# EAGLE board BOTTOM_BRDv1.0.1 (EAGLE 9.6.2)
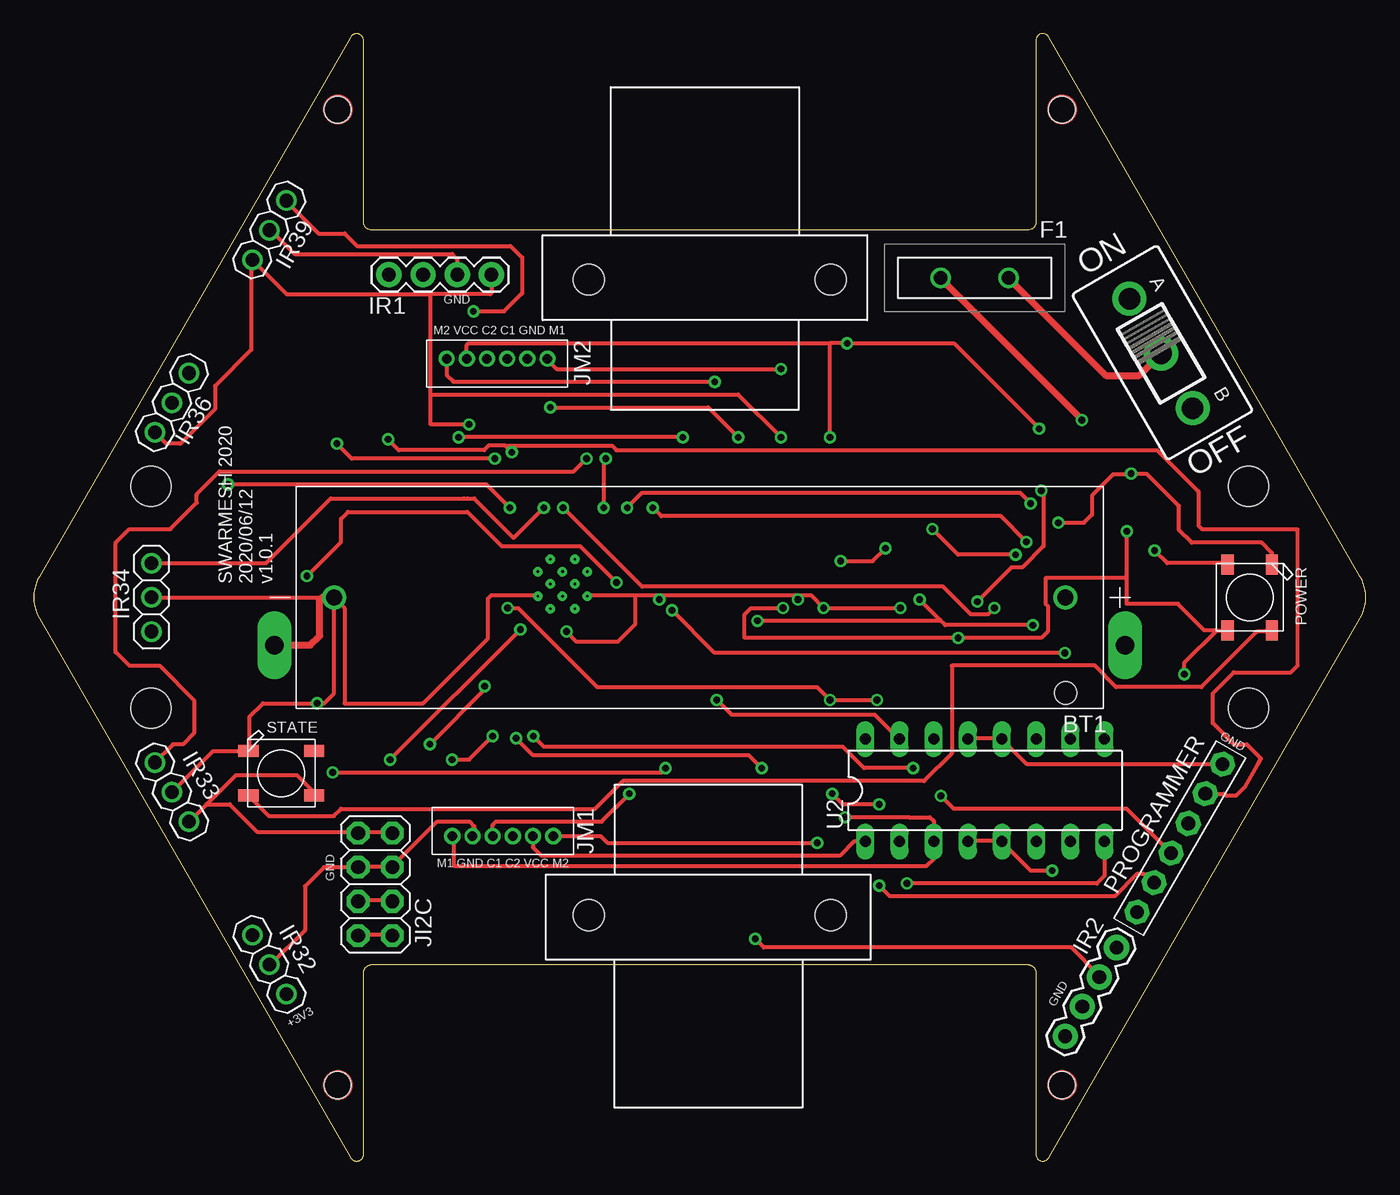
[diagram p0: board, top side]
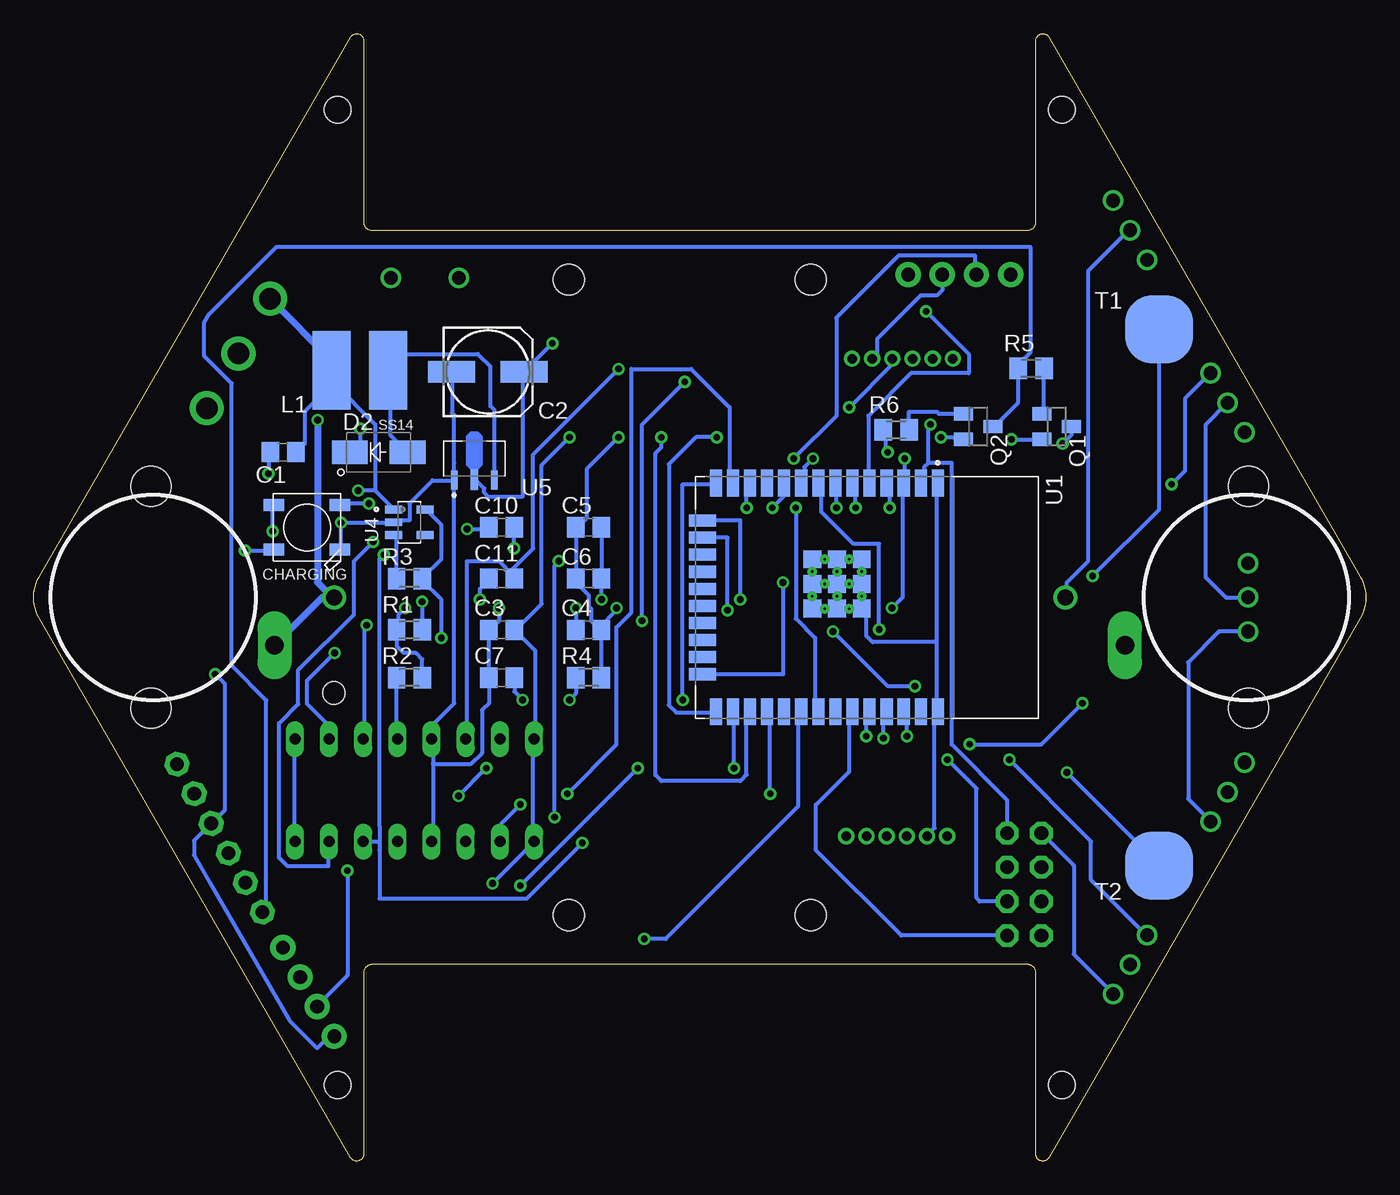
[diagram p1: board, bottom side, seen from below]

Size 99.06 x 83.84 mm. Coordinates in mm from the lower left corner, seen from the top.
Outline: 75.47,0.25 98.65,40.4 arc60 98.65,43.44 75.47,83.59 arc150 74.53,83.34 74.53,69.86 arc-90 73.89,69.22 25.17,69.22 arc-90 24.53,69.86 24.53,83.34 arc150 23.59,83.59 0.41,43.44 arc60 0.41,40.4 23.59,0.25 arc150 24.53,0.5 24.53,13.98 arc-90 25.17,14.62 73.89,14.62 arc-90 74.53,13.98 74.53,0.5 arc150 75.47,0.25
Copper layers (1*16): Top 0.035mm / dielectric 0.15mm / Bottom 0.035mm
Design rules "default *": minimum track width 12mil, minimum drill 0.5mm, track to track 12mil, track to pad 12mil, pad to pad 12mil, via to via 12mil, smd to smd 12mil, copper to edge 40mil, drill to drill 25mil, minimum pad ring 10mil, minimum via ring 8mil, stop-mask expansion 4mil, vias tented up to drill 0mil, thermal gap 10mil
Holes 2 mm at 76.46,78.19 22.61,78.19 22.61,5.65 76.46,5.65
Holes 3 mm at 8.73,50.17 8.73,33.67 90.33,50.17 90.33,33.67
Holes 2.3 mm at 41.28,65.54 59.28,65.54 59.28,18.3 41.28,18.3
tKeepout: area 74.8,76.6 to 78.1,79.8; area 21,76.6 to 24.2,79.8; area 21,4 to 24.2,7.3; area 74.8,4 to 78.1,7.3

## Footprints (pad centres in the part's own frame; a part is rotated, then mirrored left to right if it is on the bottom)
BAT_6S-AA = drill 1.19: + -27.2,0; - 27.2,0 | hole 1.67: -27.2,7.1
C0805 = smd 1.3 x 1.5: 1 -0.95,0; 2 0.95,0
153CLV-0605 = smd 3.5 x 1.6: + 2.7,0; - -2.7,0
WS2812B = smd 1.5 x 0.9: 1-VDD 2.45,-1.65; 2-DOUT 2.45,1.65; 3-GND -2.45,1.65; 4-DIN -2.45,-1.65
1X1-BIGPOGO = drill 1.4 pad 2.54 long: P$1 0,0
DO214 = smd 2.65 x 1.75: ANODE -2.15,0; CATHODE 2.15,0
RUEF300K2 = drill 1.01 pad 1.515: 1 0,0; 2 5.05,0
1X04 = drill 1.016 pad 1.88: 1 0,0; 2 2.54,0; 3 5.08,0; 4 7.62,0
1X03 = drill 1.016: 1 -2.54,0; 2 0,0; 3 2.54,0
2X04 = drill 1.016 pad 1.676 octagon: 1 -3.81,-1.27; 2 -3.81,1.27; 3 -1.27,-1.27; 4 -1.27,1.27; 5 1.27,-1.27; 6 1.27,1.27; 7 3.81,-1.27; 8 3.81,1.27
B6B-ZR = drill 0.7: 1 9,-1.3; 2 7.5,-1.3; 3 6,-1.3; 4 4.5,-1.3; 5 3,-1.3; 6 1.5,-1.3
INDP5858X480N = smd 2.8 x 5.85: 1 -2.1,0; 2 2.1,0
1X06-BIG = drill 1.016 pad 1.778 octagon: 1 -6.35,0; 2 -3.81,0; 3 -1.27,0; 4 1.27,0; 5 3.81,0; 6 6.35,0
SOT23 = smd 1 x 1.4: 1 -0.95,-1.1; 2 0.95,-1.1; 3 0,1.1
M0805 = smd 1.3 x 1.6: 1 -0.95,0; 2 0.95,0
CS12ANW03 = drill 1.6 pad 2.54: A -4.674,0; B 4.724,0; C 0.025,0
SPRING-CONNECTOR = smd 5.08 x 5.08: P$2 0,0
MODULE_ESP32-WROOM-32D = smd 2 x 0.9: 1 -8.5,5.26; 2 -8.5,3.99; 3 -8.5,2.72; 4 -8.5,1.45; 5 -8.5,0.18; 6 -8.5,-1.09; 7 -8.5,-2.36; 8 -8.5,-3.63; 9 -8.5,-4.9; 10 -8.5,-6.17; 11 -8.5,-7.44; 12 -8.5,-8.71; 13 -8.5,-9.98; 14 -8.5,-11.25; 25 8.5,-11.25; 26 8.5,-9.98; 27 8.5,-8.71; 28 8.5,-7.44; 29 8.5,-6.17; 30 8.5,-4.9; 31 8.5,-3.63; 32 8.5,-2.36; 33 8.5,-1.09; 34 8.5,0.18; 35 8.5,1.45; 36 8.5,2.72; 37 8.5,3.99; 38 8.5,5.26 | smd 0.9 x 2: 15 -5.715,-12.25; 16 -4.445,-12.25; 17 -3.175,-12.25; 18 -1.905,-12.25; 19 -0.635,-12.25; 20 0.635,-12.25; 21 1.905,-12.25; 22 3.175,-12.25; 23 4.445,-12.25; 24 5.715,-12.25 | smd 1.33 x 1.33: 39_1 -2.835,-0.405; 39_2 -1,-0.405; 39_3 0.835,-0.405; 39_4 -2.835,-2.24; 39_5 -1,-2.24; 39_6 0.835,-2.24; 39_7 -2.835,-4.075; 39_8 -1,-4.075; 39_9 0.835,-4.075 | drill 0.2 pad 0.3: 39_10 -1.917,-0.405; 39_11 -0.083,-0.405; 39_12 -2.835,-1.323; 39_13 -1,-1.323; 39_14 0.835,-1.323; 39_15 -1.917,-2.24; 39_16 -0.083,-2.24; 39_17 -2.835,-3.158; 39_18 -1,-3.158; 39_19 0.835,-3.158; 39_20 -1.917,-4.075; 39_21 -0.083,-4.075
DIL16 = drill 0.813 long: 1 -8.89,-3.81; 2 -6.35,-3.81; 3 -3.81,-3.81; 4 -1.27,-3.81; 5 1.27,-3.81; 6 3.81,-3.81; 7 6.35,-3.81; 8 8.89,-3.81; 9 8.89,3.81; 10 6.35,3.81; 11 3.81,3.81; 12 1.27,3.81; 13 -1.27,3.81; 14 -3.81,3.81; 15 -6.35,3.81; 16 -8.89,3.81
SOT95P285X140-5N = smd 1.35 x 0.6: 1 -1.185,0.95; 2 -1.185,0; 3 -1.185,-0.95; 4 1.185,-0.95; 5 1.185,0.95
REG_MCP1702T-3302E/MB = smd 1.4 x 0.48: 1 -1.425,1.5; 3 -1.425,-1.5 | smd 1.525 x 0.56: 2 -1.365,0

## Placement (x,y rotation side)
BT1  3.7V-BAT  [BAT_6S-AA]  49.53,41.92 180 top
C1  100nF  [C0805]  80.52,52.72 180 bottom
C2  100uF  [153CLV-0605]  65.28,58.68 0 bottom
C3  100nF  [C0805]  64.26,39.51 180 bottom
C4  47uF  [C0805]  57.78,39.51 180 bottom
C5  47uF  [C0805]  57.78,47.13 0 bottom
C6  100nF  [C0805]  57.78,43.32 0 bottom
C7  100nF  [C0805]  64.26,35.95 180 bottom
C10  100nF  [C0805]  64.26,47.13 180 bottom
C11  100nF  [C0805]  64.26,43.32 180 bottom
CHARGING  WS2812B5050  [WS2812B]  78.74,47.13 180 bottom
CHG+  [1X1-BIGPOGO]  81.15,38.36 270 bottom
CHG-  [1X1-BIGPOGO]  17.91,38.36 90 top
D2  SS14  [DO214]  73.41,52.72 180 bottom
F1  RUEF300K-2  [RUEF300K2]  67.44,65.67 0 top
IR1  [1X04]  26.42,65.92 0 top
IR2  [1X04]  80.52,15.89 240 top
IR32  [1X03]  17.53,14.62 300 top
IR33  [1X03]  10.29,27.44 300 top
IR34  [1X03]  8.76,41.92 270 top
IR36  [1X03]  10.29,56.4 240 top
IR39  [1X03]  17.53,69.23 240 top
JI2C  [2X04]  25.4,20.58 270 top
JM1  B6B-ZR  [B6B-ZR]  40.13,22.87 180 top
JM2  B6B-ZR  [B6B-ZR]  29.21,60.97 0 top
L1  47uH  [INDP5858X480N]  74.8,58.81 0 bottom
POWER  WS2812B5050  [WS2812B]  90.42,41.92 270 top
PROGRAMMER  [1X06-BIG]  85.22,24.01 60 top
Q1  SS8050  [SOT23]  22.99,54.62 270 bottom
Q2  SS8050  [SOT23]  28.83,54.62 270 bottom
R1  47k  [M0805]  71.12,39.51 0 bottom
R2  10k  [M0805]  71.12,35.95 0 bottom
R3  10k  [M0805]  71.12,43.32 0 bottom
R4  10k  [M0805]  57.78,35.95 0 bottom
R5  10k  [M0805]  24.89,58.94 0 bottom
R6  10k  [M0805]  34.92,54.37 0 bottom
STATE  WS2812B5050  [WS2812B]  18.41,28.84 0 top
SW1  CS12ANW03  [CS12ANW03]  83.82,60.08 300 top
T1  [SPRING-CONNECTOR]  15.37,61.86 0 bottom
T2  [SPRING-CONNECTOR]  15.37,21.98 0 bottom
U1  ESP32-WROOM-32D  [MODULE_ESP32-WROOM-32D]  37.08,41.92 270 bottom
U2  L293D  [DIL16]  70.74,27.57 0 top
U4  AP2112K-3.3  [SOT95P285X140-5N]  71.12,47.51 0 bottom
U5  CE8301  [REG_MCP1702T-3302E/MB]  66.29,52.08 90 bottom

## Library data of the parts
BT1 = 6S-AA; AVAILABILITY: Unavailable; DESCRIPTION: BATTERY HOLDER AA PC PIN; DIGIKEY-PURCHASE-URL: https://snapeda.com/shop?store=DigiKey&id=4389101; MF: MPD; MP: 6S-AA; PACKAGE: None; PRICE: None
C1-C7 C10 C11 = rcl; SPICEPREFIX: C
CHARGING CHG+ CHG- IR32-IR34 IR36 IR39 JI2C POWER PROGRAMMER STATE = adafruit
D2 = SS14; AVAILABILITY: Unavailable; DESCRIPTION: Diode Schottky 40V 1A Surface Mount SMA (DO-214AC); DIGIKEY-PURCHASE-URL: https://snapeda.com/shop?store=DigiKey&id=229686; MF: ON Semiconductor; MP: SS14; PACKAGE: DO-214AC-214 ON Semiconductor; PRICE: None
F1 = RUEF300K-2; DESCRIPTION: TE CONNECTIVITY / RAYCHEM - RUEF300K-2 - RESETTABLE FUSE, PTC, 30V, 3A, RADIAL; HEIGHT: 16.5mm; MANUFACTURER_NAME: TE CONNECTIVITY / RAYCHEM; MANUFACTURER_PART_NUMBER: RUEF300K-2
IR1 IR2 = SparkFun-Connectors; PROD_ID: CONN-09696
JM1 JM2 = B6B-ZR; AVAILABILITY: Unavailable; DESCRIPTION: Connector Header Surface Mount 6 position 0.059 _1.50mm_; MF: JST; MP: B6B-ZR; PACKAGE: None; PRICE: None
L1 = SDR0604-100KL; AVAILABILITY: Unavailable; DESCRIPTION: 10µH Unshielded Wirewound Inductor Nonstandard; MF: Bourns; MP: SDR0604-100KL; PACKAGE: Nonstandard Bourns; PRICE: None
Q1 Q2 = transistor
R1-R6 = rcl; SPICEPREFIX: R
SW1 = CS12ANW03; AVAILABILITY: Unavailable; DESCRIPTION: Slide Switch SPDT Through Hole; DIGIKEY-PURCHASE-URL: https://snapeda.com/shop?store=DigiKey&id=478299; MF: NKK Switches; MP: CS12ANW03; PACKAGE: None; PRICE: None
T1 T2 = Touch_Pad; SF_ID: PRT-11822
U1 = ESP32-WROOM-32D; AVAILABILITY: Unavailable; DESCRIPTION: Bluetooth, WiFi 802.11b/g/n, Bluetooth v4.2 +EDR, Class 1, 2 and 3 Transceiver Module 2.4GHz ~ 2.5GHz Integrated, Trace Surface Mount; MF: Espressif Systems; MP: ESP32-WROOM-32D; PACKAGE: Module Espressif Systems; PRICE: None
U2 = st-microelectronics; MPN: L293D; OC_FARNELL: 9589619; OC_NEWARK: 56P8249
U4 = AP2112K-3.3TRG1; AVAILABILITY: Unavailable; DESCRIPTION: Linear Voltage Regulator IC 1 Output 600mA SOT-25; MF: Diodes Inc.; MP: AP2112K-3.3TRG1; PACKAGE: SOT-753 Diodes Inc.; PRICE: None
U5 = MCP1702T-3302E_MB; AVAILABILITY: Unavailable; DESCRIPTION: Linear Voltage Regulator IC 1 Output 250mA SOT-89-3; MF: Microchip; MP: MCP1702T-3302E/MB; PACKAGE: SOT-89 Microchip; PRICE: None

## Nets
+3V3: C4.1 C5.1 C6.1 CHARGING.1-VDD IR1.4 IR2.4 IR32.3 IR33.3 IR34.3 IR36.3 IR39.3 JI2C.1 JI2C.2 POWER.1-VDD PROGRAMMER.4 R3.2 R4.2 STATE.1-VDD U1.2 U4.5
BATLVL: R1.1 R2.2 U1.7
CTS: PROGRAMMER.5 Q1.2 R6.1
DTR: PROGRAMMER.1 Q2.3 R5.1
E1A: JM1.3 U1.28
E2A: JM2.3 U1.27
EN: C7.1 Q1.3 R4.1 U1.3
GND: BT1.- C1.2 C2.- C3.2 C4.2 C5.2 C6.2 C7.2 CHARGING.3-GND CHG-.P$1 IR1.3 IR2.3 IR32.2 IR33.2 IR34.2 IR36.2 IR39.2 JI2C.3 JI2C.4 JM1.2 JM2.2 POWER.3-GND PROGRAMMER.6 R2.1 STATE.3-GND U1.1 U1.15 U1.38 U1.39_1 U1.39_2 U1.39_3 U1.39_4 U1.39_5 U1.39_6 U1.39_7 U1.39_8 U1.39_9 U1.39_10 U1.39_11 U1.39_12 U1.39_13 U1.39_14 U1.39_15 U1.39_16 U1.39_17 U1.39_18 U1.39_19 U1.39_20 U1.39_21 U2.4 U2.5 U2.12 U2.13 U4.2 U5.1
IO0: Q2.2 U1.25
IO5: U1.29
IO12: U1.14 U2.15
IO13: U1.16 U2.10
IO14: U1.13 U2.2
IO15: U1.23
IO23: U1.37
IO26: U1.11
IO27: U1.12 U2.7
IO32: IR32.1 U1.8
IO33: IR33.1 U1.9
IO34: IR34.1 U1.6
IO36: IR36.1 U1.4
IO39: IR39.1 U1.5
IR1: IR2.2 U1.30
IR2: IR1.2 U1.31
LEDS: CHARGING.4-DIN U1.10
M1A: C10.1 JM1.1 U2.3
M1B: C10.2 JM1.6 U2.6
M2A: C11.1 JM2.1 U2.14
M2B: C11.2 JM2.6 U2.11
N$1: BT1.+ CHG+.P$1 F1.1
N$2: R3.1 U4.3
N$3: F1.2 SW1.C
N$4: D2.ANODE L1.2 U5.3
N$5: U1.19
N$6: C1.1 L1.1 R1.2 SW1.A U4.1
N$9: CHARGING.2-DOUT POWER.4-DIN
N$12: Q1.1 R5.2
N$13: POWER.2-DOUT STATE.4-DIN
N$15: Q2.1 R6.2
N$16: U1.20
N$18: U1.21
N$23: U1.22
N$24: U1.17
N$25: U1.18
RX: PROGRAMMER.2 U1.35
SCL: JI2C.5 JI2C.6 U1.36
SDA: JI2C.7 JI2C.8 U1.33
TOUCH1: T1.P$2 U1.24
TOUCH2: T2.P$2 U1.26
TX: PROGRAMMER.3 U1.34
VCC: C2.+ C3.1 D2.CATHODE JM1.5 JM2.5 U2.1 U2.8 U2.9 U2.16 U5.2

## Tracks (layer width: path | path; a pad name or v marks a point on that pad's centre or on a via)
+3V3  (via drill 0.5)
  Top 0.305: 81.28,43.35 81.28,41.44 85.09,41.44 85.09,41.41 87.03,39.47 87.97,39.47 | 81.28,43.35 v81.28,46.84 | 81.28,43.35 75.25,43.35 75.25,41.44 75.41,41.29 75.41,39.38 74.93,38.9 v68.74,38.9 52.86,38.9 52.86,40.65 53.34,41.13 v55.72,41.13 | 88.74,39.38 POWER.1-VDD 87.97,39.47 | 24.13,24.46 26.67,24.46 JI2C.2 | 24.13,24.46 16.67,24.46 14.59,26.54 12.85,26.54 IR33.3 11.59,25.25 15.05,28.71 19.56,28.71 20.86,27.41 STATE.1-VDD | 24.13,24.46 JI2C.1 | 29.53,57 29.53,54.78 v32.38,54.78 | 29.53,57 29.53,64.46 | v55.56,53.83 52.39,57 29.53,57 | 29.53,64.46 18.82,64.46 IR39.3 16.19,67 16.19,60.34 13.49,57.64 13.49,55.92 10.92,53.35 9.86,53.35 IR36.3 | IR1.4 34.04,64.53 33.97,64.46 29.53,64.46 | v85.57,36.21 85.57,37.06 87.97,39.47
  Bottom 0.305: C4.1 56.83,39.38 56.83,36.05 R4.2 | C4.1 56.99,39.54 57.63,40.17 57.63,41.13 57.78,41.29 57.78,42.08 58.58,42.87 58.58,43.19 C6.1 58.74,43.35 58.74,47 C5.1 58.58,47.16 57.94,47.79 57.94,51.45 v55.56,53.83 | U4.5 69.85,48.43 68.74,47.32 68.74,44.78 70.17,43.35 R3.2 70.17,43.19 68.74,41.76 v68.74,38.9 | v81.28,46.84 81.28,48.75 CHARGING.1-VDD | v55.72,41.13 55.72,40.97 56.99,39.7 C4.1 | IR32.3 18.89,12.55 21.72,15.38 21.72,21.98 JI2C.1 | 32.54,51.92 32.86,51.6 32.86,50.65 33.02,50.49 U1.2 | 32.54,51.92 30.8,51.92 30.8,30.97 26.67,26.84 JI2C.2 | v32.38,54.78 32.54,54.62 32.54,51.92 | IR34.3 10.92,39.38 13.21,37.09 13.21,26.93 11.56,25.28 IR33.3 | IR2.4 77.08,9.29 77.98,8.39 79.98,10.39 85.92,20.69 | 85.92,20.69 87.12,22.77 87.12,23.84 PROGRAMMER.4 84.84,26.13 84.84,35.48 v85.57,36.21 | 85.92,20.69
BATLVL  (via drill 0.5)
  Top 0.305: v39.37,48.59 45.24,42.71 67.63,42.71 69.69,40.65 70.96,40.65 v71.44,41.13
  Bottom 0.305: v39.37,48.59 39.37,50.33 U1.7 | v71.44,41.13 71.91,40.65 71.91,39.54 R1.1 72.07,38.3 71.58,37.81 70.66,37.81 70.17,37.32 R2.2
CTS  (via drill 0.5)
  Top 0.305: v26.35,53.67 27.15,52.87 33.5,52.87 33.81,53.19 35.08,53.19 35.16,53.11 | v35.56,52.72 35.16,53.11 | 35.16,53.11 35.24,53.19 43.02,53.19 43.34,52.87 83.53,52.87 86.61,49.79 86.61,47.25 86.87,47 93.98,47 93.98,36.84 93.48,36.34 89.22,36.34 87.66,34.78 87.66,32.57 89.22,31 90.2,31 91.26,29.94 91,29.48 90.04,27.82 89.41,27.19 88.65,27.19 88.52,27.31 PROGRAMMER.5
  Bottom 0.305: v26.35,53.67 24.13,53.67 Q1.2 | v35.56,52.72 35.72,52.87 35.72,54.3 R6.1
DTR
  Bottom 0.305: Q2.3 27.62,54.62 25.88,56.37 25.88,58.91 R5.1 25.72,59.07 25.72,59.38 24.92,60.18 24.92,67.96 81.03,67.96 86.05,62.93 86.41,62.31 86.41,59.91 84.33,57.83 84.33,36.84 81.76,34.27 81.76,18.74 81.91,18.58 PROGRAMMER.1
E1A  (via drill 0.5)
  Top 0.305: v44.29,27.32 42.23,25.25 34.38,25.25 34.13,25 JM1.3
  Bottom 0.305: v44.29,27.32 44.29,33.19 44.45,33.35 U1.28
E2A  (via drill 0.5)
  Top 0.305: v52.39,53.83 50.16,56.05 v38.42,56.05
  Bottom 0.305: v52.39,53.83 52.39,53.1 52.83,52.65 52.83,28.71 52.39,28.27 46.51,28.27 46.04,28.74 46.04,33.19 45.88,33.35 U1.27 | v38.42,56.05 35.24,59.22 35.24,59.54 JM2.3
EN  (via drill 0.5)
  Top 0.305: v62.71,34.3 v59.21,34.3 58.26,35.25 41.91,35.25 36.04,41.13 v35.24,41.13 | v22.54,53.35 23.65,52.24 v34.29,52.24
  Bottom 0.305: v59.21,34.3 58.74,34.78 58.74,35.89 R4.1 | v34.29,52.24 34.29,50.49 U1.3 34.45,50.33 34.45,41.92 v35.24,41.13 | C7.1 63.31,34.91 v62.71,34.3 | Q1.3 21.89,54.01 v22.54,53.35
GND  (via drill 0.5)
  Top 0.305: v76.2,47.48 78.1,47.48 78.69,48.06 78.69,49.49 80.26,51.06 81.53,51.06 v81.6,51.13 82.74,51.13 85.15,48.72 85.15,46.94 86.11,45.98 91.31,45.98 92.07,45.22 POWER.3-GND | U2.4 69.53,23.82 71.91,23.82 U2.5 72.07,23.66 74.14,21.6 v75.72,21.6 | U2.13 69.53,31.44 71.91,31.44 U2.12 72.07,31.28 73.82,29.54 88.26,29.54 PROGRAMMER.6 | IR39.2 17.62,69.23 19.4,67.44 31.12,67.44 31.5,67.07 IR1.3 | 8.89,41.92 IR34.2 BT1.- | 17.78,38.43 CHG-.P$1 17.94,38.43 | 44.7,42.08 41.27,42.08 U1.39_21 | 44.7,42.08 46.51,42.08 | 46.51,42.08 56.83,42.08 | 56.83,42.08 57.78,42.08 v58.74,41.13 v64.45,41.13 | 46.51,42.08 v46.51,41.76 | 56.83,42.08 v56.83,41.76 | IR32.2 17.62,14.62 20.18,17.17 20.18,20.44 21.59,21.85 JI2C.3 24.13,21.92 26.67,21.92 | 26.67,21.92 30,25.25 32.42,25.25 32.77,24.9 32.77,24.3 JM1.2 | 26.67,21.92 JI2C.4 | U1.39_11 37.46,42.08 34.04,42.08 33.78,41.83 33.78,38.87 28.96,34.05 23.11,34.05 23.11,41.14 BT1.- | BT1.- 22.33,34.79 21.59,34.05 v21.08,34.05 17.05,34.05 16.03,33.03 16.03,30.49 STATE.3-GND 13.33,30.49 IR33.2 | 44.7,42.08 44.7,39.89 43.43,38.62 40.39,38.62 v39.62,39.38 | v33.53,35.32 33.53,35.06 v29.46,31
  Top 0.508: BT1.- 21.46,41.92 21.27,41.73 21.27,39.06 20.57,38.36 CHG-.P$1
  Bottom 0.305: v81.6,51.13 81.6,52.72 C1.2 | CHARGING.3-GND 76.2,45.57 v76.2,47.48 72.39,47.48 U4.2 72.23,47.64 71.12,47.64 71.12,48.91 69.4,50.62 67.82,50.62 U5.1 | C2.- 67.94,58.59 67.94,55.64 67.79,55.49 U5.1 | R2.1 72.07,35.89 72.07,31.44 U2.12 | 69.37,29.54 66.52,29.54 65.72,30.33 65.72,33.54 65.21,34.05 C7.2 65.25,36.05 65.25,39.38 C3.2 65.09,39.54 64.45,40.17 v64.45,41.13 | 69.37,29.54 69.37,31.28 U2.13 69.47,32.36 67.79,34.05 U5.1 | 69.37,29.54 69.37,23.82 U2.4 | v75.72,21.6 75.72,13.82 77.95,11.6 IR2.3 | U5.1 | JM2.2 36.67,59.7 36.35,60.02 36.35,61.13 33.11,64.37 31.91,64.37 31.5,64.78 IR1.3 | IR39.2 17.62,69.23 20.64,66.21 20.64,44.62 22.22,43.03 22.22,41.92 BT1.- | U1.39_12 38.26,44.78 37.62,44.78 U1.39_1 37.46,44.62 37.46,43.98 U1.39_10 37.46,43.83 37.46,43.03 U1.39_2 | U1.39_3 37.62,41.13 38.26,41.13 U1.39_14 | U1.39_3 37.62,41.29 37.62,41.92 U1.39_11 37.46,42.08 37.46,42.87 U1.39_2 | U1.39_6 39.37,41.13 39.37,41.92 U1.39_16 39.37,42.08 39.37,42.87 U1.39_5 | U1.39_2 37.62,43.03 38.26,43.03 U1.39_13 38.42,43.03 39.21,43.03 U1.39_5 | U1.39_5 39.37,43.03 39.37,43.83 U1.39_15 39.37,43.98 39.37,44.62 U1.39_4 39.53,44.62 40.16,44.62 U1.39_17 40.32,44.78 41.12,44.78 U1.39_7 41.27,44.62 41.27,43.98 U1.39_20 41.27,43.83 41.27,43.03 U1.39_8 41.27,42.87 41.27,42.08 U1.39_21 41.27,41.92 41.27,41.13 U1.39_9 41.12,41.13 40.32,41.13 U1.39_19 | U1.39_18 40.16,43.03 39.53,43.03 U1.39_5 | C5.2 56.83,47 56.83,43.35 C6.2 56.83,43.19 v56.83,41.76 | v58.74,41.13 58.74,39.54 C4.2 | U1.15 46.51,47.64 v46.51,41.76 | JM1.2 32.54,24.3 32.07,24.78 32.07,33.19 31.91,33.35 U1.38 31.91,33.51 31.91,38.59
  Bottom 0.305: 31.91,38.59 31.91,50.33 U1.1 | 31.91,38.59 36.67,38.59 37.15,39.06 37.15,40.65 37.46,40.97 U1.39_3 | IR34.2 10.41,41.92 11.94,43.44 11.94,54.75 IR36.2 | U5.1 67.79,51.93 | v39.62,39.38 35.56,35.32 v33.53,35.32 | v29.46,31 24.13,31 v21.08,34.05
IO0  (via drill 0.5)
  Top 0.305: v48.26,53.83 v31.59,53.83
  Bottom 0.305: v31.59,53.83 30,53.83 Q2.2 | U1.25 48.42,33.35 51.28,33.35 51.82,33.89 51.82,51.83 49.82,53.83 v48.26,53.83
IO12  (via drill 0.5)
  Top 0.305: v50.8,34.3 51.91,33.19 62.55,33.19 64.29,31.44 U2.15
  Bottom 0.305: v50.8,34.3 50.8,50.33 48.42,50.33 U1.14
IO13  (via drill 0.5)
  Top 0.305: v47.47,40.97 50.64,37.79 v76.68,37.79
  Bottom 0.305: U1.16 47.47,46.37 v47.47,40.97 | v76.68,37.79 78.74,35.73 78.74,34 77.09,32.35 U2.10
IO14  (via drill 0.5)
  Top 0.305: v59.37,27.32 60.17,26.52 v62.86,26.52
  Bottom 0.305: v59.37,27.32 55.72,30.97 55.72,39.7 54.61,40.81 54.61,58.91 50.16,58.91 47.31,56.05 47.31,50.65 47.15,50.49 U1.13 | v62.86,26.52 64.29,25.09 64.29,23.82 U2.2
IO27  (via drill 0.5)
  Top 0.305: v46.04,48.59 46.67,47.95 71.91,47.95 v73.82,46.05
  Bottom 0.305: v46.04,48.59 46.04,50.18 45.88,50.33 U1.12 | v73.82,46.05 75.25,44.62 75.25,40.65 79.37,36.52 79.37,33.98 80.8,32.55 80.8,22.55 80.17,21.92 77.15,21.92 77.15,23.66 U2.7
IO32  (via drill 0.5)
  Top 0.305: v26.51,29.86 v36.19,39.54
  Bottom 0.305: v36.19,39.54 36.19,45.89 38.1,45.89 40.48,48.27 40.48,50.18 40.64,50.33 U1.8 | v26.51,29.86 20.43,23.78 20.43,20.92 16.35,16.84 IR32.1
IO33  (via drill 0.5)
  Top 0.305: v41.12,52.24 40.16,51.29 13.81,51.29 12.13,49.6 12.13,48.97 10.16,47 7.11,47 6.1,45.98 6.1,37.86 7.11,36.84 9.37,36.84 11.94,34.27 11.94,31.82 11.11,31 10.37,31 IR33.1
  Bottom 0.305: v41.12,52.24 41.75,51.6 41.75,50.65 41.91,50.49 U1.9
IO34  (via drill 0.5)
  Top 0.305: v37.94,48.59 35.7,46.35 32.77,49.29 32.26,49.29 32,49.29 22.1,49.29 17.27,44.46 IR34.1
  Bottom 0.305: v37.94,48.59 37.94,50.18 38.1,50.33 U1.6
IO36  (via drill 0.5)
  Top 0.305: v35.4,48.59 33.65,50.33 v14.45,50.33
  Bottom 0.305: v35.4,48.59 35.4,50.18 35.56,50.33 U1.4 | IR36.1 13.46,56.69 13.46,51.32 v14.45,50.33
IO39  (via drill 0.5)
  Top 0.305: IR39.1 18.89,71.29 21.21,68.97 23.13,68.97 24.05,68.05 35.46,68.05 36.32,67.19 36.32,64.53 34.99,63.19 v32.7,63.19
  Bottom 0.305: v32.7,63.19 29.53,60.02 29.53,58.59 33.81,58.59 36.99,55.41 36.99,50.49 U1.5
IR1  (via drill 0.5)
  Top 0.305: v53.66,16.52 54.29,15.89 77.15,15.89 79.22,13.82 IR2.2
  Bottom 0.305: U1.30 42.07,33.35 42.23,33.19 42.23,26.36 52.07,16.52 v53.66,16.52
IR2  (via drill 0.5)
  Top 0.305: v42.39,48.59 42.39,52.24 v42.54,52.24
  Bottom 0.305: v42.39,48.59 42.39,40.33 40.96,38.9 40.96,33.67 40.8,33.51 U1.31 | v42.54,52.24 39.37,55.41 39.37,62.72 34.77,67.32 29.05,67.32 29.05,66.05 IR1.2
LEDS  (via drill 0.5)
  Top 0.305: v74.14,48.91 73.34,49.7 45.24,49.7 v44.13,48.59
  Bottom 0.305: v74.14,48.91 76.2,48.91 CHARGING.4-DIN | v44.13,48.59 43.34,49.38 43.34,50.33 U1.10
M1A  (via drill 0.5)
  Top 0.305: v63.34,45.57 62.39,44.62 v60.01,44.62 | v60.32,25.57 64.77,25.57 65.09,25.57 66.64,25.57 66.93,25.28 U2.3 | 66.83,23.82 U2.3 | JM1.1 31.27,24.14 31.27,21.92 66.36,21.92 66.93,22.49 66.93,23.63 U2.3
  Bottom 0.305: v63.34,45.57 63.34,47 C10.1 | v60.01,44.62 60.32,44.3 v60.32,25.57
M1B  (via drill 0.5)
  Top 0.305: v66.83,47 68.74,45.1 v73.02,45.1 | v58.26,23.66 42.67,23.66 42.17,24.17 JM1.6
  Bottom 0.305: v66.83,47 65.25,47 C10.2 | v73.02,45.1 73.34,44.78 73.34,25.66 73.34,24.93 73.34,23.63 | 74.45,23.82 U2.6 73.47,23.76 73.34,23.63 | v58.26,23.66 62.39,19.54 73.34,19.54 73.34,23.12 73.34,23.63
M2A  (via drill 0.5)
  Top 0.305: v55.56,58.91 38.89,58.91 38.21,59.59 JM2.1
  Bottom 0.305: U2.14 66.83,31.44 66.83,44.62 64.45,44.62 63.98,44.14 63.98,43.98 63.34,43.35 C11.1 63.66,43.83 61.91,45.57 61.91,52.56 v55.56,58.91
M2B  (via drill 0.5)
  Top 0.305: 67.39,40.25 67.79,39.86 v74.29,39.86 | 67.39,40.25 v65.88,41.76 | v53.82,40.17 67.31,40.17 67.39,40.25 | JM2.6 30.71,58.45 31.21,57.95 v50.64,57.95
  Bottom 0.305: v65.88,41.76 65.88,42.56 65.25,43.19 C11.2 | v74.29,39.86 74.45,39.7 74.45,31.44 U2.11 | v50.64,57.95 53.82,54.78 v53.82,40.17
N$1  (via drill 0.5)
  Top 0.508: F1.1 77.95,55.16 v77.95,55.1
  Bottom 0.305: 76.83,41.92 BT1.+
  Bottom 0.508: v77.95,55.1 77.95,43.03 76.83,41.92 | BT1.+ 77.6,41.92 CHG+.P$1
N$2
  Bottom 0.305: U4.3 72.23,46.52 72.07,46.37 72.07,43.35 R3.1
N$3
  Top 0.508: SW1.C 82.2,58.43 79.73,58.43 F1.2
N$4
  Bottom 0.305: D2.ANODE 71.28,52.72 72.55,53.99 72.55,58.75 L1.2 72.55,58.91 72.55,60.02 66.04,60.02 65.09,59.07 65.09,56.14 64.79,55.85 U5.3
N$6  (via drill 0.5)
  Top 0.305: v70.17,41.6 72.71,44.14 73.5,44.14 75.09,45.73 75.09,49.86 v74.93,49.86
  Bottom 0.305: 73.66,49.86 72.39,48.59 U4.1 | 73.66,49.86 73.66,54.78 76.83,57.95 76.83,58.75 L1.1 | C1.1 79.53,52.72 78.9,53.35 78.9,55.73 76.83,57.8 76.89,58.69 L1.1 | v70.17,41.6 70.17,39.54 R1.2 | 73.66,49.86 v74.93,49.86 | SW1.A 81.44,63.99 76.99,59.54 76.99,58.91 L1.1
  Bottom 0.508: SW1.A 76.89,59.54 76.89,58.69
N$9  (via drill 0.5)
  Top 0.305: v83.34,45.41 84.3,44.46 88.74,44.46 POWER.4-DIN
  Bottom 0.305: v83.34,45.41 81.28,45.41 CHARGING.2-DOUT
N$12
  Bottom 0.305: Q1.1 23.97,55.57 23.97,58.91 R5.2
N$13
  Top 0.305: POWER.2-DOUT 91.92,39.38 90.96,39.38 86.84,35.25 80.49,35.25 78.9,36.84 68.26,36.84 68.26,30.33 66.2,28.27 43.81,28.27 41.75,26.2 22.86,26.2 22.32,25.66 17.49,25.66 STATE.4-DIN
N$15
  Bottom 0.305: Q2.1 30,55.57 31.75,55.57 31.91,55.73 33.97,55.73 33.97,54.46 R6.2
RX  (via drill 0.5)
  Top 0.305: v35.88,31.44 37.15,30.17 53.18,30.17 v54.13,29.22 | v62.86,20.49 63.66,19.7 80.39,19.7 82.04,21.35 82.55,21.35 83.18,20.71 PROGRAMMER.2
  Bottom 0.305: v35.88,31.44 35.88,33.19 35.72,33.35 U1.35 | v62.86,20.49 v54.13,29.22
SCL  (via drill 0.5)
  Top 0.305: v34.13,31.6 32.38,29.86 v31.11,29.86 | JI2C.5 24.13,19.38 26.67,19.38 JI2C.6
  Bottom 0.305: v34.13,31.6 34.13,33.19 34.29,33.35 U1.36 | v31.11,29.86 28.96,27.7 28.96,19.57 28.7,19.31 JI2C.6
SDA
  Top 0.305: JI2C.7 24.13,16.84 26.67,16.84 JI2C.8
  Bottom 0.305: U1.33 38.26,33.35 38.42,33.19 38.42,28.97 40.89,26.49 40.89,23.12 34.54,16.77 JI2C.8
TOUCH1  (via drill 0.5)
  Top 0.305: v20.32,43.51 22.86,46.05 22.86,47.76 23.37,48.27 32.26,48.27 34.8,45.73 40.64,45.73 v43.34,43.03
  Bottom 0.305: U1.24 43.34,36.21 v43.34,43.03 | v20.32,43.51 15.4,48.43 15.4,61.76 T1.P$2
TOUCH2  (via drill 0.5)
  Top 0.305: v46.99,29.22 46.67,28.9 v22.22,28.9
  Bottom 0.305: v46.99,29.22 46.99,33.35 U1.26 | v22.22,28.9 15.4,22.08 T2.P$2
TX  (via drill 0.5)
  Top 0.305: v37.15,31.6 37.94,30.81 60.17,30.81 61.75,29.22 v65.4,29.22 | v67.47,27.16 68.42,26.2 81.28,26.2 84.45,23.03 PROGRAMMER.3
  Bottom 0.305: v37.15,31.6 37.15,33.19 36.99,33.35 U1.34 | v67.47,27.16 v65.4,29.22
VCC  (via drill 0.5)
  Top 0.305: 59.21,60.81 v60.48,60.81 68.42,60.81 v74.77,54.46 | v59.21,53.83 59.21,60.81 | JM1.5 37.13,23.33 37.75,22.71 59.94,22.71 60.99,23.76 U2.1 | U2.8 79.63,21.22 79.06,20.65 v64.93,20.65 | JM2.5 32.21,60.67 32.35,60.81 59.21,60.81
  Bottom 0.305: U5.2 66.2,50.65 65.56,50.02 65.56,49.7 65.25,49.38 62.71,49.38 62.71,58.59 C2.+ 62.55,58.75 v60.48,60.81 | v74.77,54.46 74.77,53.35 75.41,52.72 D2.CATHODE | U2.8 79.69,23.82 79.69,31.28 U2.9 | v64.93,20.65 61.91,23.66 U2.1 61.91,23.82 61.91,31.28 U2.16 61.75,31.44 61.75,37.95 63.18,39.38 C3.1 63.18,39.54 61.28,41.44 61.28,51.76 v59.21,53.83
(copper drawn outside any net)
  shapes: Top circle x4

## Text on the board
tPlace: ON | GND | M2 VCC C2 C1 GND M1 | OFF | SWARMESH 2020 / 2020/06/12 / v1.0.1 | GND | M1 GND C1 C2 VCC M2 | GND | GND | +3V3